# EAGLE board stepperDriverTop (EAGLE 9.6.2)
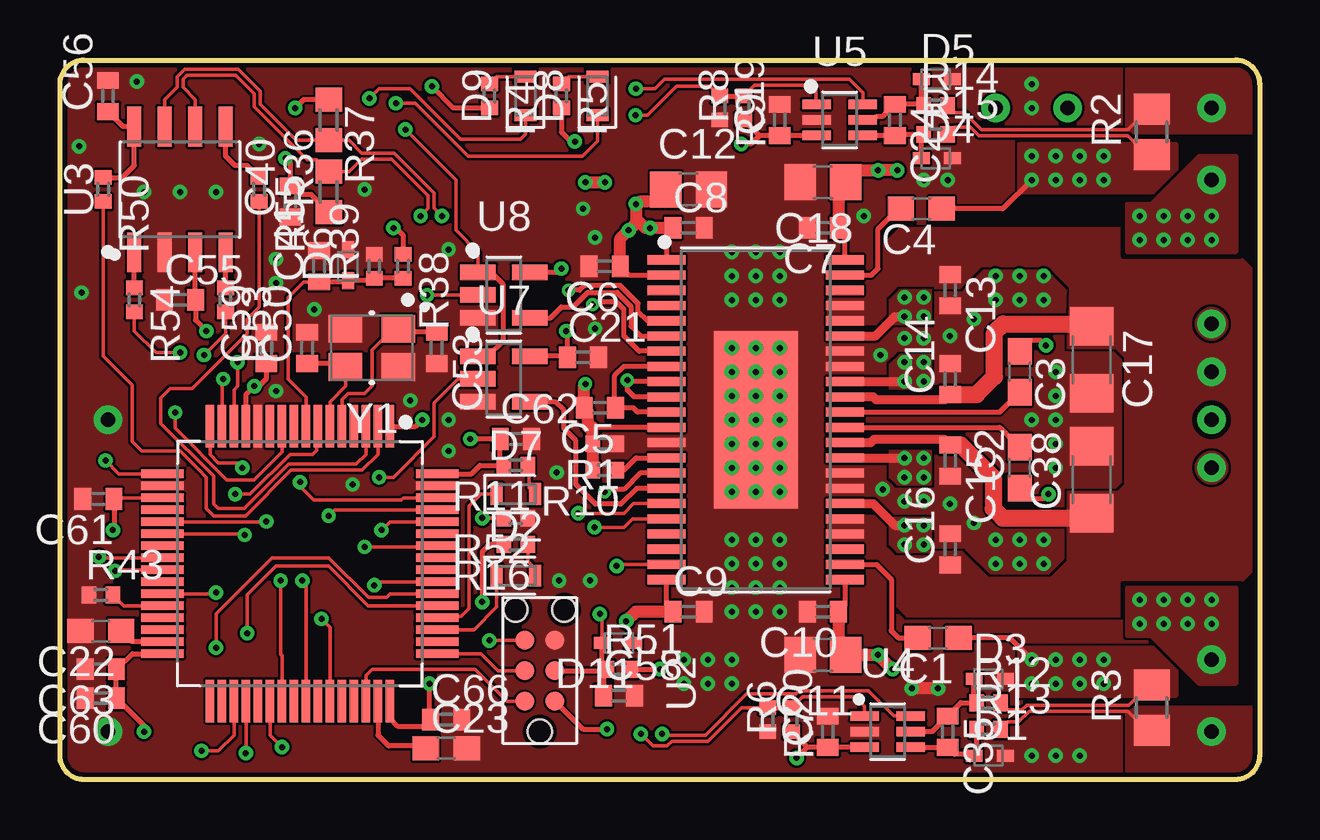
[diagram p0: board, top side]
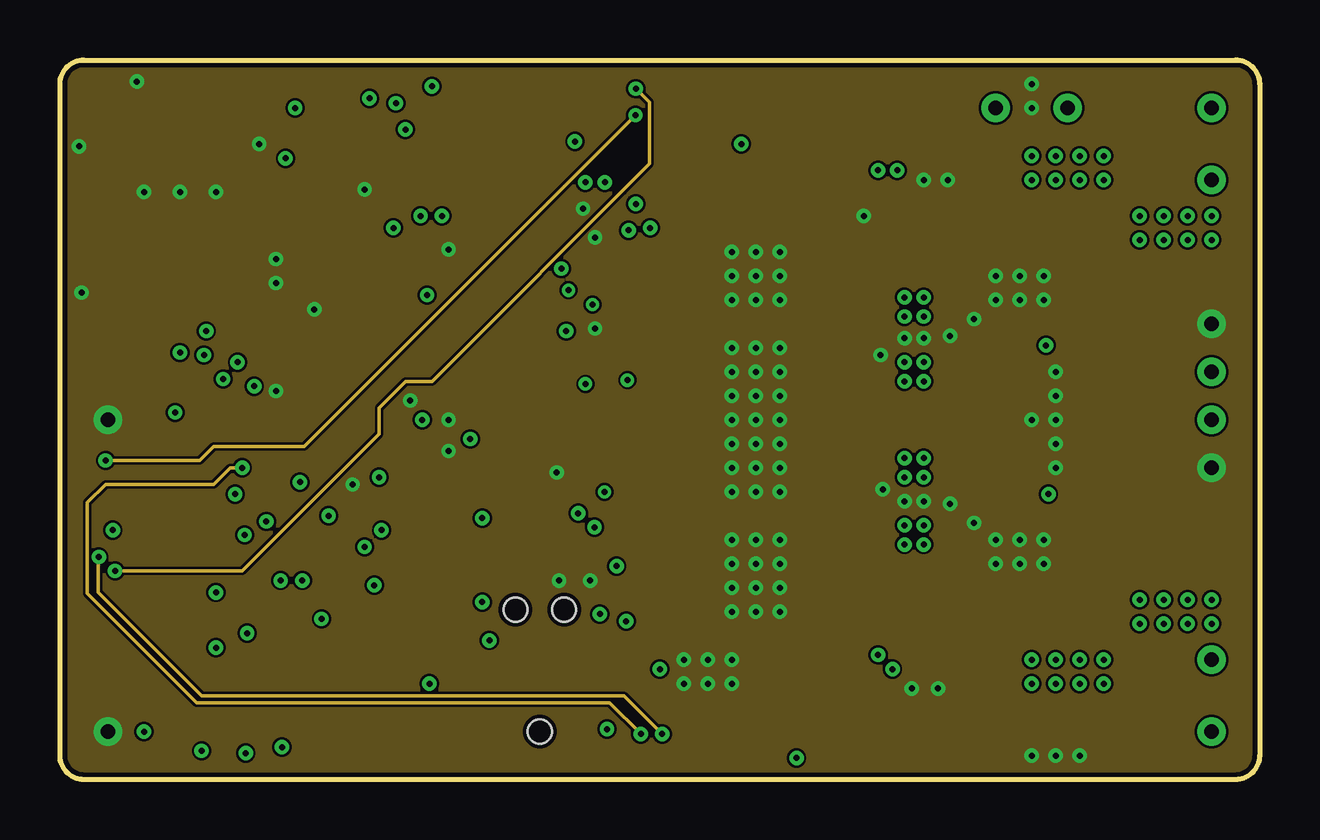
[diagram p1: board, inner layer Route2]
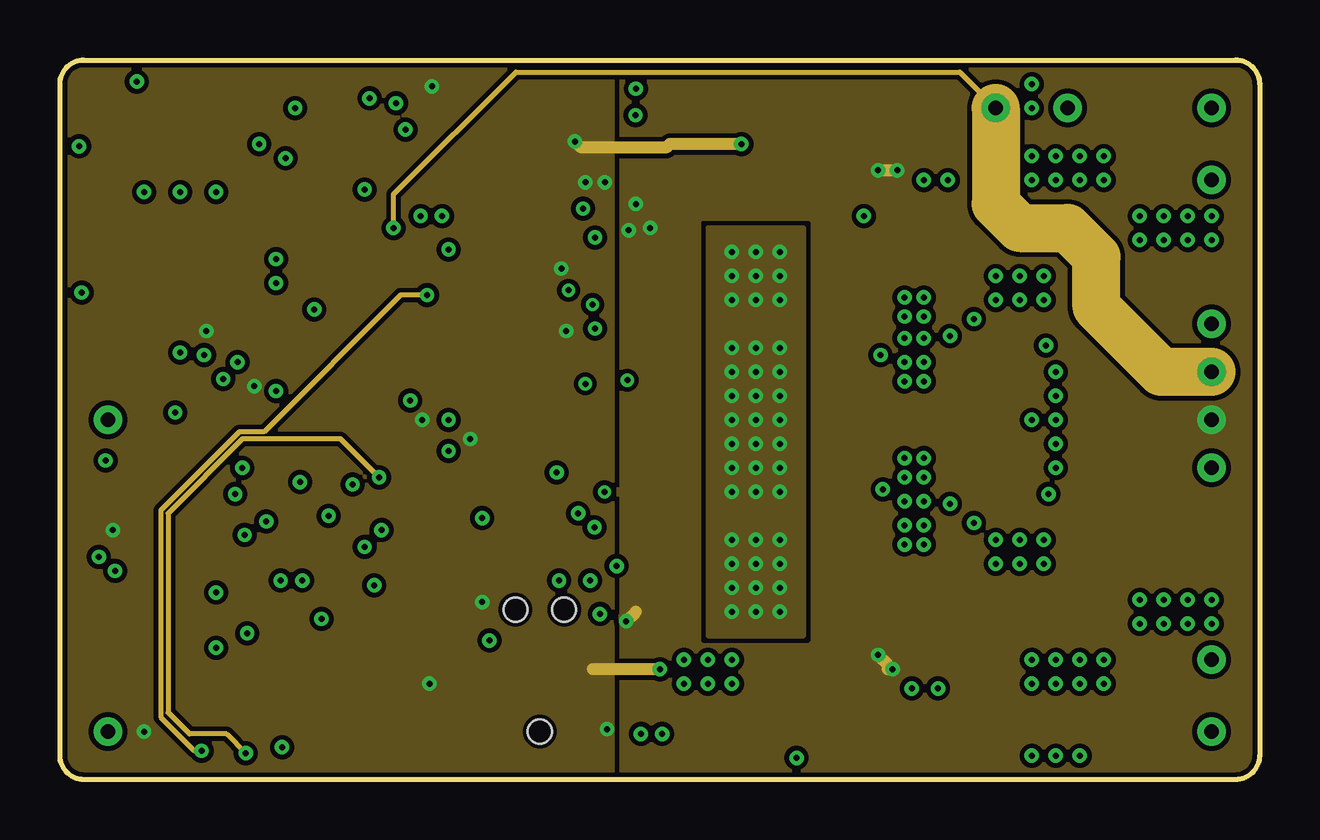
[diagram p2: board, inner layer Route15]
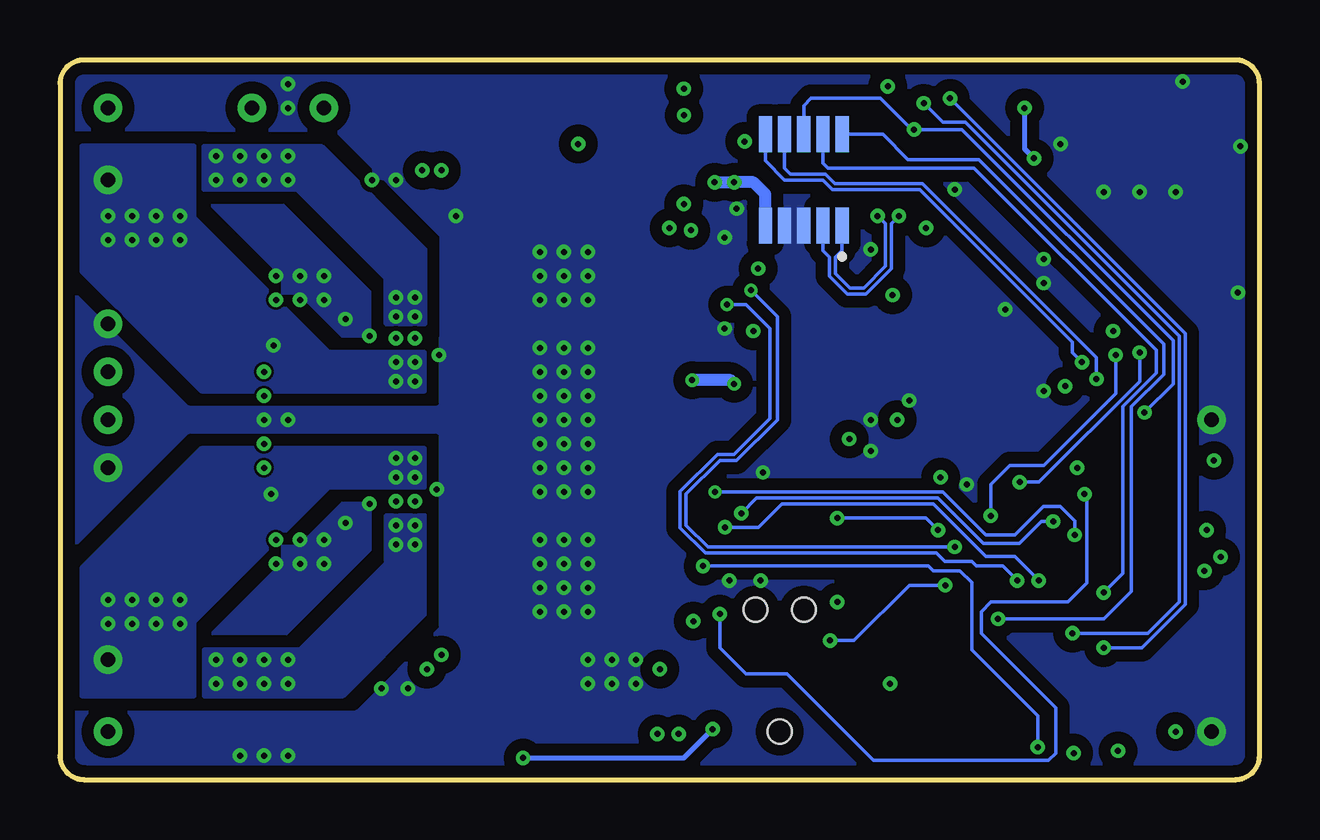
[diagram p3: board, bottom side, seen from below]

Size 50 x 30 mm. Coordinates in mm from the lower left corner, seen from the top.
Outline: 0,1 0,29 arc-90 1,30 49,30 arc-90 50,29 50,1 arc-90 49,0 1,0 arc-90 0,1
Copper layers (1+2*15+16): Top 0.035mm / dielectric 0.2mm / Route2 0.0175mm / dielectric 0.465mm / Route15 0.0175mm / dielectric 0.2mm / Bottom 0.035mm
Design rules "JLC4LayerRules *": minimum track width 0.1mm, minimum drill 0.2mm, track to track 0.1mm, track to pad 0.2mm, pad to pad 0.128mm, via to via 0.29mm, smd to smd 0mil, copper to edge 0.2mm, drill to drill 0.2mm, minimum pad ring 0.15mm, minimum via ring 0.15mm, stop-mask expansion 4mil, vias tented up to drill 0.25mm, thermal gap 10mil

## Footprints (pad centres in the part's own frame; a part is rotated, then mirrored left to right if it is on the bottom)
C0603 = smd 1.1 x 1: 1 -0.85,0; 2 0.85,0
C0402 = smd 0.7 x 0.9: 1 -0.65,0; 2 0.65,0
C0805 = smd 1.3 x 1.5: 1 -0.95,0; 2 0.95,0
C1206 = smd 1.6 x 1.8: 1 -1.4,0; 2 1.4,0
SOD523 = smd 0.7 x 0.5: A 0.7,0; C -0.6,0
LEDC1608X39N_R = smd 0.512 x 0.912: 1 -0.8,0; 2 0.8,0
LEDC1608X39N_G = smd 0.512 x 0.912: 1 -0.8,0; 2 0.8,0
R0402 = smd 0.6 x 0.7: 1 -0.5,0; 2 0.5,0
R0805 = smd 1.3 x 1.5: 1 -0.95,0; 2 0.95,0
R0603 = smd 1 x 1.1: 1 -0.85,0; 2 0.85,0
SOP63P810X120-45T350X740N = smd 1.572 x 0.38: 1 -3.722,6.668; 2 -3.722,6.032; 3 -3.722,5.397; 4 -3.722,4.763; 5 -3.722,4.128; 6 -3.722,3.493; 7 -3.722,2.857; 8 -3.722,2.223; 9 -3.722,1.587; 10 -3.722,0.953; 11 -3.722,0.318; 12 -3.722,-0.318; 13 -3.722,-0.953; 14 -3.722,-1.587; 15 -3.722,-2.223; 16 -3.722,-2.857; 17 -3.722,-3.493; 18 -3.722,-4.128; 19 -3.722,-4.763; 20 -3.722,-5.397; 21 -3.722,-6.032; 22 -3.722,-6.668; 23 3.722,-6.668; 24 3.722,-6.032; 25 3.722,-5.397; 26 3.722,-4.763; 27 3.722,-4.128; 28 3.722,-3.493; 29 3.722,-2.857; 30 3.722,-2.223; 31 3.722,-1.587; 32 3.722,-0.953; 33 3.722,-0.318; 34 3.722,0.318; 35 3.722,0.953; 36 3.722,1.587; 37 3.722,2.223; 38 3.722,2.857; 39 3.722,3.493; 40 3.722,4.128; 41 3.722,4.763; 42 3.722,5.397; 43 3.722,6.032; 44 3.722,6.668 | smd 3.5 x 7.4: 45 0,0 | drill 0.25 pad 0.6: V_1 1,3; V_2 -1,3; V_3 -1,2; V_4 1,2; V_5 0,2; V_6 0,3; V_7 -1,1; V_8 0,1; V_9 1,1; V_10 1,0; V_11 0,0; V_12 -1,0; V_13 -1,-1; V_14 0,-1; V_15 1,-1; V_16 1,-2; V_17 0,-2; V_18 -1,-2; V_19 -1,-3; V_20 0,-3; V_21 1,-3
QFP50P1200X1200X120-64 = smd 1.769 x 0.34: 1 -5.721,3.75; 2 -5.721,3.25; 3 -5.721,2.75; 4 -5.721,2.25; 5 -5.721,1.75; 6 -5.721,1.25; 7 -5.721,0.75; 8 -5.721,0.25; 9 -5.721,-0.25; 10 -5.721,-0.75; 11 -5.721,-1.25; 12 -5.721,-1.75; 13 -5.721,-2.25; 14 -5.721,-2.75; 15 -5.721,-3.25; 16 -5.721,-3.75; 33 5.721,-3.75; 34 5.721,-3.25; 35 5.721,-2.75; 36 5.721,-2.25; 37 5.721,-1.75; 38 5.721,-1.25; 39 5.721,-0.75; 40 5.721,-0.25; 41 5.721,0.25; 42 5.721,0.75; 43 5.721,1.25; 44 5.721,1.75; 45 5.721,2.25; 46 5.721,2.75; 47 5.721,3.25; 48 5.721,3.75 | smd 0.34 x 1.769: 17 -3.75,-5.721; 18 -3.25,-5.721; 19 -2.75,-5.721; 20 -2.25,-5.721; 21 -1.75,-5.721; 22 -1.25,-5.721; 23 -0.75,-5.721; 24 -0.25,-5.721; 25 0.25,-5.721; 26 0.75,-5.721; 27 1.25,-5.721; 28 1.75,-5.721; 29 2.25,-5.721; 30 2.75,-5.721; 31 3.25,-5.721; 32 3.75,-5.721; 49 3.75,5.721; 50 3.25,5.721; 51 2.75,5.721; 52 2.25,5.721; 53 1.75,5.721; 54 1.25,5.721; 55 0.75,5.721; 56 0.25,5.721; 57 -0.25,5.721; 58 -0.75,5.721; 59 -1.25,5.721; 60 -1.75,5.721; 61 -2.25,5.721; 62 -2.75,5.721; 63 -3.25,5.721; 64 -3.75,5.721
SOIC127P599X175-8N = smd 1.661 x 0.599: 1 -2.623,1.905; 2 -2.623,0.635; 3 -2.623,-0.635; 4 -2.623,-1.905; 5 2.623,-1.905; 6 2.623,-0.635; 7 2.623,0.635; 8 2.623,1.905
SOP65P210X110-6N = smd 1.186 x 0.397: 1 -0.962,0.65; 2 -0.962,0; 3 -0.962,-0.65; 4 0.962,-0.65; 5 0.962,0; 6 0.962,0.65
SOT95P240X110-5 = smd 1.48 x 0.649: 1 -1.075,0.95; 2 -1.075,0; 3 -1.075,-0.95; 4 1.075,-0.95; 5 1.075,0.95
TC2030-NL = smd 0.787 x 0.787: 1 -0.635,-1.27; 2 0.635,-1.27; 3 -0.635,-2.54; 4 0.635,-2.54; 5 -0.635,-3.81; 6 0.635,-3.81 | hole 0.991: 0,0; -1.016,-5.08; 1.016,-5.08
3128-1 = drill 0.61 pad 1.2: PIN1 0,0
524651071 = smd 0.55 x 1.5: 1 -1.6,1.9; 2 -0.8,1.9; 3 0,1.9; 4 0.8,1.9; 5 1.6,1.9; 6 -1.6,-1.9; 7 -0.8,-1.9; 8 0,-1.9; 9 0.8,-1.9; 10 1.6,-1.9
WE-XTAL_CFPX-180 = smd 1.4 x 1.15: 1 -1.1,-0.8; 2 1.1,-0.8; 3 1.1,0.8; 4 -1.1,0.8

## Placement (x,y rotation side)
C1  100nF  [C0603]  36.6,5.9 180 top
C2  100nF  [C0603]  40,13 90 top
C3  100nF  [C0603]  40,17 270 top
C4  100nF  [C0603]  35.9,23.8 180 top
C5  100nF  [C0402]  22.5,15.5 180 top
C6  1uF  [C0402]  22.7,21.4 180 top
C7  1uF  [C0402]  31.8,23 180 top
C8  1uF  [C0402]  26.2,23 0 top
C9  1uF  [C0402]  26.2,7 0 top
C10  1uF 25V  [C0402]  31.8,7 180 top
C11  22uF  [C0805]  31.8,5.2 180 top
C12  22uF  [C0805]  26.2,24.6 0 top
C13  100nF  [C0402]  37.1,20.4 270 top
C14  100nF  [C0402]  37.1,16.7 90 top
C15  100nF  [C0402]  37.1,13.3 270 top
C16  100nF  [C0402]  37.1,9.6 90 top
C17  10uF  [C1206]  43,17.5 270 top
C18  22uF  [C0805]  31.8,24.9 180 top
C19  100nF  [C0402]  30,27.5 90 top
C20  100nF  [C0402]  32,2 90 top
C21  100nF  [C0402]  21.8,17.6 0 top
C22  2.2uF  [C0603]  1.7,6.2 180 top
C23  2.2uF  [C0603]  16.1,1.3 0 top
C24  1uF  [C0402]  34.8,27.5 270 top
C35  1uF  [C0402]  37,2 270 top
C38  10uF  [C1206]  43,12.5 90 top
C40  4.7nF  [C0402]  9.6,24.1 90 top
C41  100nF  [C0402]  10.8,21.4 90 top
C50  10pF  [C0402]  10.3,18 90 top
C53  10pF  [C0402]  15.7,18 270 top
C55  4.7uF  [C0402]  5,20 0 top
C56  100nF  [C0402]  2,28.5 90 top
C58  100nF  [C0402]  23.3,3.5 0 top
C59  100nF  [C0402]  8.6,18 90 top
C60  100nF  [C0402]  1.7,3.4 180 top
C61  100nF  [C0402]  1.6,11.7 180 top
C62  100nF  [C0402]  19,14.2 0 top
C63  1uF  [C0402]  1.7,4.6 180 top
C66  100nF  [C0402]  16.1,2.5 0 top
D1  PESD24VS1UB  [SOD523]  38.7,1 0 top
D2  LED_CHIP_RED-1608  [LEDC1608X39N_R]  19,8.5 0 top
D3  PESD24VS1UB  [SOD523]  38.7,4.2 0 top
D4  PESD24VS1UB  [SOD523]  36.5,25.9 0 top
D5  PESD24VS1UB  [SOD523]  36.5,29.2 0 top
D6  ESD5Z3V3  [SOD523]  12,21.4 90 top
D7  LED_CHIP_GREEN-1608  [LEDC1608X39N_G]  19,11.9 0 top
D8  LED_CHIP_GREEN-1608  [LEDC1608X39N_G]  22.4,28.5 90 top
D9  LED_CHIP_ORANGE-1608  [LEDC1608X39N_G]  19.4,28.5 90 top
D11  SDM10U45-7  [SOD523]  23.3,5.7 180 top
R1  1Ohm  [R0402]  22.7,14 180 top
R2  10mOhm  [R0805]  45.5,27 90 top
R3  10mOhm  [R0805]  45.5,3 90 top
R4  1k  [R0402]  17.9,28.5 270 top
R5  1k  [R0402]  20.9,28.5 270 top
R6  10k  [R0402]  30.5,2.5 90 top
R7  10k  [R0402]  29.5,2.5 270 top
R8  10k  [R0402]  28.5,28 90 top
R9  10k  [R0402]  27.5,28 270 top
R10  36k  [R0402]  22.7,12.9 180 top
R11  1k  [R0402]  19,13.1 180 top
R12  10Ohm  [R0402]  38.7,3.2 0 top
R13  10Ohm  [R0402]  38.7,2.1 0 top
R14  10Ohm  [R0402]  36.5,28.1 0 top
R15  10Ohm  [R0402]  36.5,26.9 0 top
R16  1k  [R0402]  19,9.8 180 top
R36  62R  [R0603]  11.2,24.5 90 top
R37  62R  [R0603]  11.2,27.5 270 top
R38  10k  [R0402]  14.3,21.4 270 top
R39  1k  [R0402]  13.1,21.4 90 top
R43  10k  [R0402]  1.7,7.7 0 top
R50  10k  [R0402]  1.8,24.6 270 top
R51  10k  [R0402]  23.3,4.6 0 top
R52  10k  [R0402]  19,10.9 180 top
R53  10k  [R0402]  6.9,20 270 top
R54  10k  [R0402]  3.1,20 270 top
R55  10k  [R0402]  8.3,24.6 270 top
U1  DRV8412  [SOP63P810X120-45T350X740N]  29,15 0 top
U2  [QFP50P1200X1200X120-64]  10,9 270 top
U3  [SOIC127P599X175-8N]  5,24.6 90 top
U4  INA199A1DCKR  [SOP65P210X110-6N]  34.5,2 0 top
U5  INA199A1DCKR  [SOP65P210X110-6N]  32.5,27.5 0 top
U7  SN74LVC1G08  [SOT95P240X110-5]  18.5,16.7 0 top
U8  SN74LVC1G08  [SOT95P240X110-5]  18.5,20.2 0 top
X1  TC2030-NLTC2030-IDC-NL-FP  [TC2030-NL]  20,2 180 top
X2  3128-1  [3128-1]  48,17 0 top
X3  3128-1  [3128-1]  48,19 0 top
X4  3128-1  [3128-1]  48,2 0 top
X5  3128-1  [3128-1]  48,5 0 top
X6  3128-1  [3128-1]  48,25 0 top
X7  3128-1  [3128-1]  48,28 0 top
X8  3128-1  [3128-1]  2,2 0 top
X9  3128-1  [3128-1]  2,15 0 top
X10  524651071  [524651071]  19,25 180 bottom
X11  3128-1  [3128-1]  39,28 0 top
X12  3128-1  [3128-1]  42,28 0 top
X13  3128-1  [3128-1]  48,15 0 top
X14  3128-1  [3128-1]  48,13 0 top
Y1  25MHz - X322516MLB4SI  [WE-XTAL_CFPX-180]  13,18 180 top

## Library data of the parts
C1-C24 C35 C38 C40 C41 C50 C53 C55 C56 C58-C63 C66 = rcl; SPICEPREFIX: C
D1 D3-D6 D11 = diode
D2 = Opto-Electronic; CATEGORY: Opto-Electronic; COLOR: Red; SUB-CATEGORY: LED
D7-D9 = Opto-Electronic; CATEGORY: Opto-Electronic; COLOR: Green; SUB-CATEGORY: LED
R1-R16 R36-R39 R43 R50-R55 = rcl; SPICEPREFIX: R
U1-U5 U7 U8 = stepperDriver
X1-X14 = connectors
Y1 = Wurth_Quartz Crystals & Oscillators_WE-XTAL; C-LOAD: 10pF; DATASHEET-URL: https://www.we-online.com/catalog/datasheet/830059800.pdf; MOUNT: SMT; PART-NUMBER: 830059800; STABILITY: 10ppm; TOLERANCE: ±10ppm

## Nets
!FAULT: U1.18 U2.39
!OTW: U1.21 U2.38
!RESET_AB: U1.16 U7.4
!RESET_CD: U1.6 U8.4
!RST_AB: U2.36 U7.2
!RST_CD: U2.35 U8.2
+3V3: C19.1 C20.1 C21.1 C55.2 C59.1 C60.1 C61.1 C62.1 C63.1 C66.1 R4.2 R5.2 R6.1 R8.1 R11.2 R16.2 R51.2 U2.1 U2.13 U2.19 U2.32 U2.48 U2.64 U3.3 U4.3 U5.3 U7.5 U8.5 X1.1 X10.5
+12V0: C6.1 C7.1 C8.1 C9.1 C10.1 C11.1 C12.1 C18.1 U1.1 U1.2 U1.22 U1.23 U1.44 X13.PIN1
+24V0: C13.1 C14.1 C15.1 C16.1 C17.1 C38.1 R38.1 U1.26 U1.27 U1.32 U1.35 U1.40 U1.41 X2.PIN1 X11.PIN1
AGND: C5.2 R1.2 R10.2 U1.9 U1.10 U1.12
BRAKE_MON: U2.43 X10.6
BST_A: C1.2 U1.24
BST_B: C2.2 U1.33
BST_C: C3.2 U1.34
BST_D: C4.2 U1.43
CAN_N [diff pairs]: R36.2 U3.6 X10.2
CAN_P [diff pairs]: R37.2 U3.7 X10.1
EN: R55.2 U2.3
ENC_A: U2.14 X10.10
ENC_B: U2.15 X10.9
GND: C6.2 C7.2 C8.2 C9.2 C10.2 C11.2 C12.2 C13.2 C14.2 C15.2 C16.2 C17.2 C18.2 C19.2 C20.2 C21.2 C22.2 C23.2 C38.2 C40.1 C41.2 C50.2 C53.2 C55.1 C56.2 C58.2 C59.2 C60.2 C61.2 C62.2 C63.2 C66.2 D1.A D3.A D4.A D5.A D6.A R1.1 R7.2 R9.2 R39.2 R43.1 R52.1 U1.13 U1.29 U1.30 U1.37 U1.38 U1.45 U1.V_1 U1.V_2 U1.V_3 U1.V_4 U1.V_5 U1.V_6 U1.V_7 U1.V_8 U1.V_9 U1.V_10 U1.V_11 U1.V_12 U1.V_13 U1.V_14 U1.V_15 U1.V_16 U1.V_17 U1.V_18 U1.V_19 U1.V_20 U1.V_21 U2.12 U2.18 U2.63 U3.2 U4.2 U5.2 U7.3 U8.3 X1.5 X3.PIN1 X8.PIN1 X9.PIN1 X10.3 X10.4 X14.PIN1 Y1.2 Y1.4
HOME: U2.27 X10.7
HSE_IN: C53.1 U2.5 Y1.1
HSE_OUT: C50.1 U2.6 Y1.3
I_1: U2.24 U4.6
I_2: U2.25 U5.6
I_REF1: R6.2 R7.1 U2.16 U4.1
I_REF2: R8.2 R9.1 U2.17 U5.1
IN+1: C35.2 D1.C R13.1 U4.4
IN+2: C24.2 D4.C R15.1 U5.4
IN-1: C35.1 D3.C R12.1 U4.5
IN-2: C24.1 D5.C R14.1 U5.5
LED_ERROR: D2.1 U2.51
LED_HEARTBEAT: D7.1 U2.52
LED_RX: D8.1 U2.53
LED_TX: D9.1 U2.54
N$1: D9.2 R4.1
N$2: D8.2 R5.1
N$3: D7.2 R11.1
N$4: D2.2 R16.1
N$21: C40.2 R36.1 R37.1
N$24: R43.2 U2.28
N$25: R52.2 U2.60
N$26: C56.1 R50.1 U3.8
N$27: R53.1 U3.4
N$28: R54.1 U3.1
N$29: R55.1 U3.5
NRST: C58.1 D11.A R51.1 U2.7 X1.3
OC_ADJ: R10.1 U1.14
OUT_A: C1.1 R3.2 R12.2 U1.28
OUT_A_W: R3.1 R13.2 X4.PIN1
OUT_B: C2.1 U1.31 X5.PIN1
OUT_C: C3.1 U1.36 X6.PIN1
OUT_D: C4.1 R2.1 R15.2 U1.39
OUT_D_W: R2.2 R14.2 X7.PIN1
PWM_A: U1.17 U2.21
PWM_B: U1.15 U2.22
PWM_C: U1.7 U2.41
PWM_D: U1.5 U2.58
R-: X12.PIN1
RESET: D11.C
RS: R50.2 U2.2
RXD: R53.2 U2.61
STO_IN: U2.10 U7.1 U8.1 X10.8
SWCLK: U2.49 X1.4
SWDIO: U2.46 X1.2
SWO: U2.55 X1.6
TXD: R54.2 U2.62
V+_SENSE: C41.1 D6.C R38.2 R39.1 U2.8
VCAP1: C22.1 U2.31
VCAP2: C23.1 U2.47
VREG: C5.1 U1.8 U1.11

## Tracks (layer width: path | path; a pad name or v marks a point on that pad's centre or on a via)
!FAULT  (via drill 0.25 pad 0.6)
  Top 0.15: U1.18 23.87,10.87 23.52,10.52 v22.28,10.52 | U2.39 9.25,5.18 9.2,5.23 v9.2,8.3
  Bottom 0.15: v22.28,10.52 20.88,10.52 19.91,11.48 13.59,11.48 11.4,9.3 10.2,9.3 v9.2,8.3
!OTW  (via drill 0.25 pad 0.6)
  Top 0.15: v9.25,1.35 8.75,1.85 U2.38 | v23.2,8.9 23.27,8.97 U1.21
  Bottom 0.15: v9.25,1.35 9.25,2.65 12,5.4 12,8.21 12.49,8.7 13.6,8.7 13.8,8.9 v23.2,8.9
!RESET_AB
  Top 0.2: U1.16 24.04,12.14 23.38,11.48 22.32,11.48 21.5,12.3 21.5,14.13 21,14.63 21,15.4 20.65,15.75 U7.4
!RESET_CD
  Top 0.2: U8.4 20.45,19.25 20.9,19.7 21.39,19.7 21.99,20.3 23.22,20.3 23.8,19.72 23.8,18.9 24.21,18.49 U1.6
!RST_AB  (via drill 0.25 pad 0.6)
  Top 0.15: U7.2 16.6,16.7 15.6,15.7 15.6,14.79 15.6,14.3 13.9,12.6 v13.3,12.6 | v7.75,1.1 v7.75,1.11 U2.36
  Route15 0.2: v13.3,12.6 11.7,14.2 7.6,14.2 4.5,11.1 4.5,2.8 5.4,1.9 6.95,1.9 v7.75,1.1
!RST_CD  (via drill 0.25 pad 0.6)
  Top 0.15: v5.9,1.2 6.6,1.2 7.25,1.85 U2.35 | U8.2 v15.3,20.2
  Route15 0.2: v15.3,20.2 14.2,20.2 8.5,14.5 7.48,14.5 4.2,11.22 4.2,2.6 5.6,1.2 v5.9,1.2
+3V3  (via drill 0.25 pad 0.6)
  Top 0.15: U2.19 2.3,11.75 C61.1
  Top 0.2: U8.5 20.75,21.15 v20.9,21.3 | U3.3 5.63,20.02 C55.2 5.65,19.15 v6.1,18.7 | U2.13 7.75,16.05 v8.1,16.4 8.3,16.4 8.6,16.7 C59.1 | U2.64 17.15,12.75 17.5,13.1 R11.2 18.35,13.25 C62.1 v17.1,14.2 | U2.48 13.75,2.55 14.1,2.2 15.15,2.2 C66.1 15.4,2.55 v15.4,4 | R16.2 17.9,9.8 17.6,9.5 v17.6,7.4 | U2.1 14.82,14.72 v15.1,15 | X1.1 21.8,2.1 v22.8,2.1 | R4.2 16.4,28 v15.5,28.9 | R5.2 20.9,27 21.3,26.6 v21.46,26.6 | U5.3 C19.1 29.15,26.85 | 29.15,26.85 R8.1 | 29.15,26.85 28.8,26.5 v28.4,26.5 | U4.3 C20.1 31.15,1.35 | 31.15,1.35 R6.1 | 31.15,1.35 v30.7,0.9 | R51.2 v25,4.6 | U2.32 3.02,5.25 2.37,4.6 C63.1 C60.1 3.5,2.25 v3.5,2 | C61.1 2.25,10.45 v2.2,10.4 | U7.5 21.1,17.65 C21.1 21.15,18.65 v21.1,18.7
  Top 0.5: v21.9,24.9 v22.71,24.9
  Route15 0.5: v25,4.6 22.2,4.6 | v28.4,26.5 25.43,26.5 25.27,26.35 21.72,26.35 v21.46,26.6
  Bottom 0.2: 21.57,26.5 v21.46,26.6 | v30.7,0.9 24,0.9 v22.8,2.1
  Bottom 0.5: X10.5 20.6,24.4 21.1,24.9 v21.9,24.9 v22.71,24.9
  pour Route15 (isolate 0.2): 0,30 23,30 23,0 0,0
+12V0  (via drill 0.25 pad 0.6)
  Top 0.2: U1.44 32.72,22.73 C7.1 | U1.23 32.72,7.27 32.48,7.03 C10.1 | U1.1 25.28,22.73 C8.1 | C9.1 25.28,7.27 U1.22 | C6.1 23.72,21.03 U1.2
  Top 0.5: C8.1 v24.6,23 24.4,23 24.1,23.3 24,23.2 | C7.1 32.45,24.95 32.5,24.9 C18.1 33.25,25.4 v34.1,25.4 v34.9,25.4 | 32.4,6.95 32.48,7.03 32.48,5.47 C11.1 v34.1,5.2 v34.7,4.6 | C9.1 24,7 v23.6,6.6 | C6.1 23.35,22.55 v23.7,22.9 24,23.2 | C12.1 24.75,24.1 24.2,24.1 24.1,24 v24,24 24,23.2
  Route15 0.5: v23.6,6.6 24,7 | v34.1,5.2 34.5,4.8 34.5,4.6 v34.7,4.6 | v34.1,25.4 v34.9,25.4
  pour Route15 (isolate 0.2, rank 2, no thermals): 23,0 23,30 50,30 50,0
+24V0  (via drill 0.25 pad 0.6)
  Top 0.2: v13.9,23 14,23 14.3,22.7 R38.1
  Top 0.38: U1.32 33.8,14.05 33.95,14.19 36.86,14.19 C15.1 | C14.1 36.88,15.83 34.02,15.83 33.9,15.95 U1.35
  Top 0.7: C15.1 37.55,13.95 38.9,12.6 38.9,11.3 39.3,10.9 42.8,10.9 C38.1 | C14.1 38.2,16.05 38.95,16.8 38.95,18.63 39.32,19 42.9,19 C17.1
  Route15 0.2: v13.9,23 13.9,24.4 19,29.5 37.5,29.5 X11.PIN1
  Route15 2: X11.PIN1 39,24 40,23 42,23 43.2,21.8 43.2,19.7 45.9,17 X2.PIN1
  pour Top (rank 2, no thermals): 42.04,18.1 42.11,20.49 41.2,21.4 38.4,21.4 37.5,20.5 35,20.5 34.5,20 34.5,19.5 34,19 32,19 32,20 35,23 43,23 44,22 44,18.1
  pour Top (rank 2, no thermals): 32,11 32,10.1 35.3,6.8 42.1,6.8 43.9,8.6 43.9,11.9 42.1,11.9 42.1,9.2 41.3,8.4 38.7,8.4 37.6,9.5 35.8,9.5 34.3,11
  pour Top (isolate 0.2, rank 2, no thermals): 42,6.8 47.8,6.8 50,9 50,21 48,23 42.5,23 42.5,19 42,18.5 42,18 44,18 44.4,17.6 44.4,12.3 44.1,12 42,12
AGND  (via drill 0.25)
  Top 0.2: U1.9 23.69,16.59 23.7,16.6 v23.65,16.65 23.65,16.25 23.95,15.95 U1.10 | U1.12 22.2,14.68
  Top 0.5: R10.2 R1.2 22.2,14.68 22.02,14.68 22,14.7 22,15.35 C5.2 21.85,16.45 v21.9,16.5
  Bottom 0.5: v21.9,16.5 22.05,16.65 v23.65,16.65
BRAKE_MON  (via drill 0.25 pad 0.6)
  Top 0.15: v10.9,6.7 11.25,6.35 U2.43
  Bottom 0.15: X10.6 15.7,26.9 14.65,25.85 11.7,25.85 4,18.15 4,16.89 5.35,15.54 5.35,7.85 6.5,6.7 v10.9,6.7
BST_A
  Top 0.2: U1.24 34.03,8.97 34.65,8.35 34.65,6.2 34.95,5.9 C1.2
BST_B
  Top 0.2: U1.33 39.17,14.68 C2.2
BST_C
  Top 0.2: U1.34 39.17,15.32 C3.2
BST_D
  Top 0.2: U1.43 33.83,21.03 34.1,21.3 34.1,22.95 34.95,23.8 C4.2
CAN_N  (via drill 0.25 pad 0.6)
  Top 0.15: U3.6 5.63,28.35 5.12,28.86 5.12,29.2 5.3,29.38 7.33,29.38 8.1,28.6 8.1,28.05 10.2,25.95 10.3,25.85 10.7,25.85 R36.2 12.05,25.35 12.57,25.88 13.82,25.88 15.35,24.35 15.35,23.82 v15.03,23.5
  Bottom 0.15: X10.2 18.2,22.05 17.93,21.77 17.93,21 17.18,20.25 16.4,20.25 15.35,21.3 15.35,23.18 v15.03,23.5
CAN_P  (via drill 0.25 pad 0.6)
  Top 0.15: U3.7 4.37,28.35 4.88,28.86 4.88,29.3 5.2,29.62 7.43,29.62 8.35,28.7 8.35,28.15 9.85,26.65 R37.2 12.05,26.65 12.57,26.12 13.93,26.12 15.6,24.45 15.6,23.82 v15.92,23.5
  Bottom 0.15: X10.1 17.4,22.05 17.68,21.77 17.68,21.1 17.07,20.5 16.5,20.5 15.6,21.4 15.6,23.18 v15.92,23.5
EN
  Top 0.15: R55.2 8.3,19.7 7.8,19.2 7.8,18.6 5.5,16.3 4.6,16.3 4.2,15.9 4.2,14.85 6.4,12.65 6.4,11.5 6.6,11.3 7.68,11.3 9.53,13.15 9.68,13.15 9.69,13.15 10.31,13.15 10.32,13.15 12.35,13.15 12.75,13.55 U2.3
ENC_A  (via drill 0.25 pad 0.6)
  Top 0.15: U2.14 7.25,16.25 7.4,16.4 v7.4,17.4
  Bottom 0.15: X10.10 20.6,25.8 19.8,25 18.21,25 17.81,24.6 14.15,24.6 7.8,18.25 7.8,17.8 v7.4,17.4
ENC_B  (via drill 0.25 pad 0.6)
  Top 0.15: U2.15 6.75,16.65 v6.8,16.7
  Bottom 0.15: X10.9 19.8,25.5 19.55,25.25 18.1,25.25 17.7,24.85 14.05,24.85 6.8,17.6 v6.8,16.7
GND  (via drill 0.25 pad 0.6)
  Top 0.5: v36.6,3.8 v35.5,3.8
  other vias: 41.5,15 40.5,15 41.5,16 41.5,14 41.5,13 41.5,17 35.2,11.6 36,11.6 39,9 40,9 41,9 39,10 40,10 41,10 41,20 40,20 39,20 39,21 40,21 41,21 37.1,18.5 36,18.4 35.2,18.4 34.2,17.7 37.1,11.5 38.1,10.7 38.1,19.2 34.3,12.1 33.5,23.5 37,25 36,25 40.5,29 40.5,28 40.5,1 41.5,1 42.5,1 16.2,13.7 16.2,15 20.7,12.8 20.8,8.3 22.1,8.3 16.2,22.1 10.6,19.6 14.6,15.8 12.2,12.3 9,16.2 9,20.7 9,21.7 12.7,24.6 8.3,26.5 3.5,24.5 6.5,24.5 5,24.5 3.2,29.1 0.8,26.4 0.9,20.3 22.3,22.6 21.8,23.8 22.3,18.8 28,10 29,10 30,10 30,9 29,9 28,9 28,8 29,8 30,8 30,7 29,7 28,7 28,4 27,4 26,4 26,5 27,5 28,5 28,20 29,20 30,20 30,21 29,21 28,21 28,22 29,22 30,22
  pour Route2 (no thermals): 0,0 50,0 50,30 0,30
  pour Top (rank 6, no thermals): 0,0 0,30 50,30 50,0
  pour Bottom (isolate 0.5, rank 6, no thermals): 0,30 50,30 50,0 0,0
  pour Route15 (no thermals): 27,6 31,6 31,23 27,23
HOME  (via drill 0.25 pad 0.6)
  Top 0.15: v6.5,7.8 6.45,7.75 U2.27
  Bottom 0.15: X10.7 18.2,25.7 18,25.5 11.9,25.5 4.3,17.9 4.3,16.95 5.7,15.55 5.7,8.6 v6.5,7.8
HSE_IN
  Top 0.15: U2.5 11.75,15.85 12,16.1 12.7,16.1 13,16.4 13,17.9 13.9,18.8 Y1.1
  Top 0.2: C53.1 14.65,18.65 14.5,18.8 Y1.1
HSE_OUT
  Top 0.15: U2.6 11.25,15.75 11.9,16.4 Y1.3
  Top 0.2: Y1.3 11.75,17.35 C50.1
I_1  (via drill 0.25 pad 0.6)
  Top 0.15: U4.6 34.75,2.65 33.7,3.7 30.8,3.7 30.68,3.58 28.62,3.58 26.9,1.85 25.15,1.85 v25.1,1.9 | U2.24 1.75,9.25 1.7,9.2 v1.62,9.28
  Route2 0.15: v25.1,1.9 23.5,3.5 5.9,3.5 1.6,7.8 1.6,9.26 v1.62,9.28
I_2  (via drill 0.25 pad 0.6)
  Top 0.15: U5.6 33.46,28.64 32.9,29.2 25.2,29.2 24.8,28.8 v24,28.8 | U2.25 2.35,8.75 v2.3,8.7
  Route2 0.15: v2.3,8.7 7.6,8.7 13.3,14.4 13.3,15.5 14.4,16.6 15.5,16.6 24.57,25.67 24.57,28.23 v24,28.8
I_REF1  (via drill 0.25 pad 0.6)
  Top 0.15: U4.1 33.54,3.05 33.14,3.45 30.95,3.45 R6.2 | R7.1 28.4,3 27,1.6 25.51,1.6 25.31,1.4 24.71,1.4 v24.21,1.9 | U2.16 6.25,13.55 6.6,13.2 7.4,13.2 v7.6,13
  Top 0.2: R7.1 R6.2
  Route2 0.15: v24.21,1.9 22.91,3.2 5.7,3.2 1.14,7.76 1.14,11.54 1.9,12.3 6.4,12.3 7.1,13 v7.6,13
I_REF2  (via drill 0.25 pad 0.6)
  Top 0.15: U5.1 31.5,28.19 31.5,28.7 31.25,28.95 28.95,28.95 R8.2 | R9.1 27.1,28.9 25.69,28.9 24.49,27.7 v23.99,27.7 | U2.17 2.45,12.75 v1.9,13.3
  Top 0.2: R9.1 R8.2
  Route2 0.15: v1.9,13.3 5.82,13.3 6.4,13.88 10.17,13.88 v23.99,27.7
IN+1
  Top 0.2: U4.4 C35.2 37.3,1.05 38.05,1.05 D1.C 38.2,1.1 R13.1
IN+2
  Top 0.2: D4.C 35.9,26.8 R15.1 34.85,26.9 C24.2 U5.4
IN-1
  Top 0.2: U4.5 36.35,2 C35.1 37.55,3.2 R12.1 38.1,3.3 D3.C
IN-2
  Top 0.2: U5.5 33.9,27.5 34.05,27.65 34.3,27.65 C24.1 35.95,28.15 R14.1 35.9,28.2 D5.C
LED_ERROR
  Top 0.15: U2.51 17.25,6.25 18.2,7.2 D2.1
LED_HEARTBEAT
  Top 0.15: U2.52 15.78,6.8 16.72,6.8 17.05,7.13 17.05,11.4 17.55,11.9 D7.1
LED_RX  (via drill 0.25 pad 0.6)
  Top 0.15: v14,28.2 14.8,28.2 17,26 21.78,26 22.4,26.62 D8.1 | U2.53 12.85,7.25 11.2,8.9 9,8.9 7.8,7.7 v7.8,6.1
  Bottom 0.15: v14,28.2 13.2,27.4 12.25,27.4 3.35,18.5 3.35,7.4 4.65,6.1 v7.8,6.1
LED_TX  (via drill 0.25 pad 0.6)
  Top 0.15: v12.9,28.4 13.3,28.8 14.6,28.8 16.7,26.7 19.2,26.7 19.4,26.9 D9.1 | v6.5,5.5 6.5,6.9 8.85,9.25 11.2,9.25 12.86,7.6 13.61,7.6 13.76,7.75 U2.54
  Bottom 0.15: v12.9,28.4 3.1,18.6 3.1,7.3 4.9,5.5 v6.5,5.5
N$1
  Top 0.15: R4.1 18.2,29.3 D9.2
N$2
  Top 0.15: R5.1 21.2,29.3 D8.2
N$3
  Top 0.15: D7.2 19.55,12.15 19.55,13.05
  Top 0.2: 19.55,13.05 R11.1
N$4
  Top 0.15: D2.2 19.8,8.8 19.5,9.1 R16.1
N$21  (via drill 0.25 pad 0.6)
  Top 0.2: R37.1 10.15,28.35 v9.8,28 | v9.4,25.9 9.6,25.7 C40.2 9.65,24.75 10,24.4 10.45,24.4 R36.1
  Bottom 0.2: v9.8,28 9.8,26.3 v9.4,25.9
N$24
  Top 0.15: R43.2 2.65,7.25 U2.28
N$25  (via drill 0.25 pad 0.6)
  Top 0.15: R52.2 v17.6,10.9 | v13.4,10.4 13.75,10.75 U2.60
  Bottom 0.15: v17.6,10.9 13.9,10.9 v13.4,10.4
N$26
  Top 0.2: R50.1 2.6,25.1 3.1,25.59 U3.8 2.63,27.22 C56.1
N$27
  Top 0.2: R53.1 U3.4
N$28
  Top 0.2: R54.1 U3.1
N$29
  Top 0.2: R55.1 7.8,25.6 7.3,25.6 6.91,26 U3.5
NRST  (via drill 0.25 pad 0.6)
  Top 0.15: U2.7 10.7,14.67 10.7,13.72 10.53,13.56 9.59,13.56 7.93,11.9 v7.3,11.9 | v22.5,6.9 22.6,6.8 D11.A
  Top 0.2: C58.1 22.65,4.45 R51.1 | R51.1 22.6,4.8 D11.A | X1.3 22.74,4.54 R51.1
  Bottom 0.15: v7.3,11.9 7.2,11.8 7.2,10.41 7.2,8.2 8,7.4 11.2,7.4 11.6,7 11.6,6.1 8.5,3 8.5,1.1 8.8,0.8 16.1,0.8 19.7,4.4 21.4,4.4 22.5,5.5 v22.5,6.9
OC_ADJ
  Top 0.2: R10.1 23.5,12.9 24.01,13.41 U1.14
OUT_A  (via drill 0.25 pad 0.6)
  Top 0.15: R3.2 45.4,3.95 44.55,3.1 40.3,3.1 40.1,2.9 39.5,2.9 R12.2
  Top 0.2: C1.1 39.6,5.9 v40.5,5
  Top 0.38: U1.28 33.89,11.51 34.8,10.6 v35.2,10.6
  other vias: 36,10.6 36,9.8 35.2,9.8 40.5,4 41.5,4 41.5,5 42.5,5 42.5,4 43.5,4 43.5,5
  pour Top (no thermals): 36.3,10.9 34.6,10.9 34.6,9.8 34.9,9.5 36.3,9.5
  pour Top (rank 4, no thermals): 40,5.5 46.5,5.5 46.5,3.5 40,3.5
  pour Bottom (isolate 0.2, no thermals): 34.8,11 36.4,11 36.4,9 40,5.4 44,5.4 44,3.5 38.2,3.5 34.8,6.9
OUT_A_W
  Top 0.15: R13.2 39.5,2.4 39.95,2.4 40.4,2.85 44.5,2.85 45.3,2.05 R3.1
  pour Top (no thermals): 44.5,3 50,3 50,0 44.5,0
OUT_B  (via drill 0.25 pad 0.6)
  Top 0.2: C2.1 40.45,11.7 41,11.7 v41.2,11.9
  Top 0.38: U1.31 35.19,13.41 v35.2,13.4
  other vias: 36,13.4 36,12.6 35.2,12.6 47,6.5 46,6.5 45,6.5 45,7.5 46,7.5 47,7.5 48,7.5 48,6.5
  pour Top (no thermals): 36.3,13.7 34.6,13.7 34.6,12.6 34.9,12.3 36.3,12.3
  pour Bottom (no thermals): 44.4,3.5 44.4,6.6 38.8,12.2 34.8,12.2 34.8,13.8 44.1,13.8 49.1,8.8 49.1,3.5
  pour Top (isolate 0.2, no thermals): 44.5,8 49,8 49,4 47.5,4 45.5,6 44.5,6
OUT_C  (via drill 0.25 pad 0.6)
  Top 0.2: C3.1 40.45,18.3 40.9,18.3 v41.1,18.1
  Top 0.38: U1.36 35.19,16.59 v35.2,16.6
  other vias: 35.2,17.4 36,17.4 36,16.6 47,23.5 46,23.5 45,23.5 45,22.5 46,22.5 47,22.5 48,22.5 48,23.5
  pour Top: 36.3,17.7 36.3,16.3 34.6,16.3 34.6,17.3 35,17.7
  pour Bottom (rank 2, no thermals): 34.8,17.8 38.8,17.8 44.4,23.4 44.4,26.4 49.1,26.4 49.1,21.2 44.1,16.2 34.8,16.2
  pour Top (isolate 0.2, no thermals): 44.5,22 44.5,24 45.5,24 47.5,26 49,26 49,22
OUT_D  (via drill 0.25 pad 0.6)
  Top 0.15: R15.2 37.3,27.2 37.95,27.2 38.3,26.85 44.5,26.85 45.3,26.05 R2.1
  Top 0.2: v40.5,25 39.3,23.8 C4.1
  Top 0.38: U1.39 33.99,18.49 34.8,19.3 v35.2,19.3
  other vias: 36,19.3 36,20.1 35.2,20.1 41.5,25 42.5,25 42.5,26 41.5,26 40.5,26 43.5,26 43.5,25
  pour Top: 36.3,20.4 35,20.4 34.6,20 34.6,19 36.3,19
  pour Bottom (isolate 0.2, no thermals): 34.8,19 36.4,19 36.4,20.9 40.1,24.6 44,24.6 44,26.4 39.1,26.4 34.8,22.1
  pour Top (rank 2, no thermals): 40,26.5 46.5,26.5 46.5,24.5 40,24.5
OUT_D_W
  Top 0.15: R2.2 45.35,27.95 44.5,27.1 38.4,27.1 37.7,27.8 37.3,27.8 R14.2
  pour Top (no thermals): 50,30 50,27 44.5,27 44.5,30
PWM_A  (via drill 0.25 pad 0.6)
  Top 0.15: U1.17 23.91,11.51 23.5,11.1 v21.6,11.1 | U2.21 v8.6,10.75 v8.6,10.76
  Bottom 0.15: v21.6,11.1 20.96,11.73 13.4,11.73 11.51,9.85 10.02,9.85 9.1,10.76 v8.6,10.76
PWM_B  (via drill 0.25, 0.25 pad 0.6)
  Top 0.15: U2.22 7.58,10.25 7.63,10.2 v7.7,10.2
  Top 0.2: U1.15 24.18,12.78 23.5,12.1 22.7,12.1 v22.7,11.98
  Bottom 0.15: v7.7,10.2 7.7,10.79 8.3,11.38 9,11.38 10.19,10.2 11.41,10.2 13.2,11.98 v22.7,11.98
PWM_C  (via drill 0.25, 0.25 pad 0.6)
  Top 0.15: v10.1,8.3 10.25,8.15 U2.41
  Top 0.2: U1.7 24.14,17.86 23.5,18.5 23.5,19.6 23.2,19.9 22.3,19.9 v22.2,19.8
  Bottom 0.15: v22.2,19.8 21.4,19.8 20.4,18.8 20.4,15.06 21.9,13.55 22.6,13.55 24.15,12 24.15,10.5 23.1,9.45 13.46,9.45 13.11,9.1 12,9.1 11.8,8.9 10.7,8.9 v10.1,8.3
PWM_D  (via drill 0.25, 0.25 pad 0.6)
  Top 0.15: v12.7,9.7 15.67,9.7 U2.58
  Top 0.2: U1.5 24.47,19.13 24.1,19.5 24.1,19.85 23.34,20.6 21.87,20.6 21.66,20.4 v21.2,20.4
  Bottom 0.15: v21.2,20.4 20.1,19.3 20.1,15 21.8,13.3 22.5,13.3 23.9,11.9 23.9,10.6 23,9.7 v12.7,9.7
RS
  Top 0.15: R50.2 1.8,17.65 3,16.45 3,14.1 3.4,13.7 5,13.7 5.8,12.9 6.1,12.6 6.1,11.3 6.4,11 7.74,11 9.64,12.9 9.79,12.9 10.21,12.9 12.6,12.9 13.25,13.55 U2.2
RXD  (via drill 0.25 pad 0.6)
  Top 0.15: U2.61 11.45,11.25 v11.2,11 | R53.2 6.9,18.6 v6,17.7
  Bottom 0.15: v6,17.7 6,16.1 9,13.1 10.4,13.1 11.2,12.3 v11.2,11
STO_IN  (via drill 0.25 pad 0.6)
  Top 0.15: v14.4,27.1 16.5,25 16.5,22.9 17.43,21.97 U8.1 | U2.10 9.25,13.65 8.1,12.5 6.95,12.5 4.8,14.65 v4.8,15.3
  Top 0.2: U8.1 17.96,21.15 18.47,20.65 18.47,18.27 17.85,17.65 U7.1
  Bottom 0.15: X10.8 19,28.1 18.7,28.4 15.8,28.4 14.5,27.1 v14.4,27.1 12.4,27.1 3.6,18.3 3.6,16.5 v4.8,15.3
SWCLK
  Top 0.15: X1.4 18.26,4.54 17.55,5.25 U2.49
SWDIO
  Top 0.15: X1.2 18.63,3.27 17.3,4.6 13,4.6 12.75,4.35 U2.46
SWO  (via drill 0.25 pad 0.6)
  Top 0.15: X1.6 v17.9,5.8 | U2.55 13.25,8.25 v13.1,8.1
  Bottom 0.15: v17.9,5.8 16.9,5.8 14.6,8.1 v13.1,8.1
TXD  (via drill 0.25 pad 0.6)
  Top 0.15: R54.2 3.1,18.7 4,17.8 v5,17.8 | U2.62 14.32,11.75 14.22,11.65 10.56,11.65 10,12.21 v10,12.4
  Bottom 0.15: v5,17.8 5,16.6 9.2,12.4 v10,12.4
V+_SENSE
  Top 0.15: U2.8 10.25,15.95 9.5,16.7 9.5,20.1 10.15,20.75 C41.1
  Top 0.2: R38.2 R39.1 13,20.8 D6.C 11.95,20.75 C41.1
VCAP1
  Top 0.2: U2.31 3,5.75 C22.1
VCAP2
  Top 0.2: U2.47 13.25,1.85 13.7,1.4 15.15,1.4 C23.1
VREG
  Top 0.2: U1.11 24.08,15.32 23.9,15.5 C5.1 23.1,15.55 23.1,16.81 23.51,17.22 U1.8